# Altium PCB PCB1.PcbDoc (part 3 of 4)
Units mm, origin at the board's own origin, x right, y up, seen from the top; angles counter-clockwise.
Board outline 99.06 x 89.76 mm, 2 copper layers (Top Layer, Bottom Layer); 159 components, 99 nets, 478 pads, 226 vias.
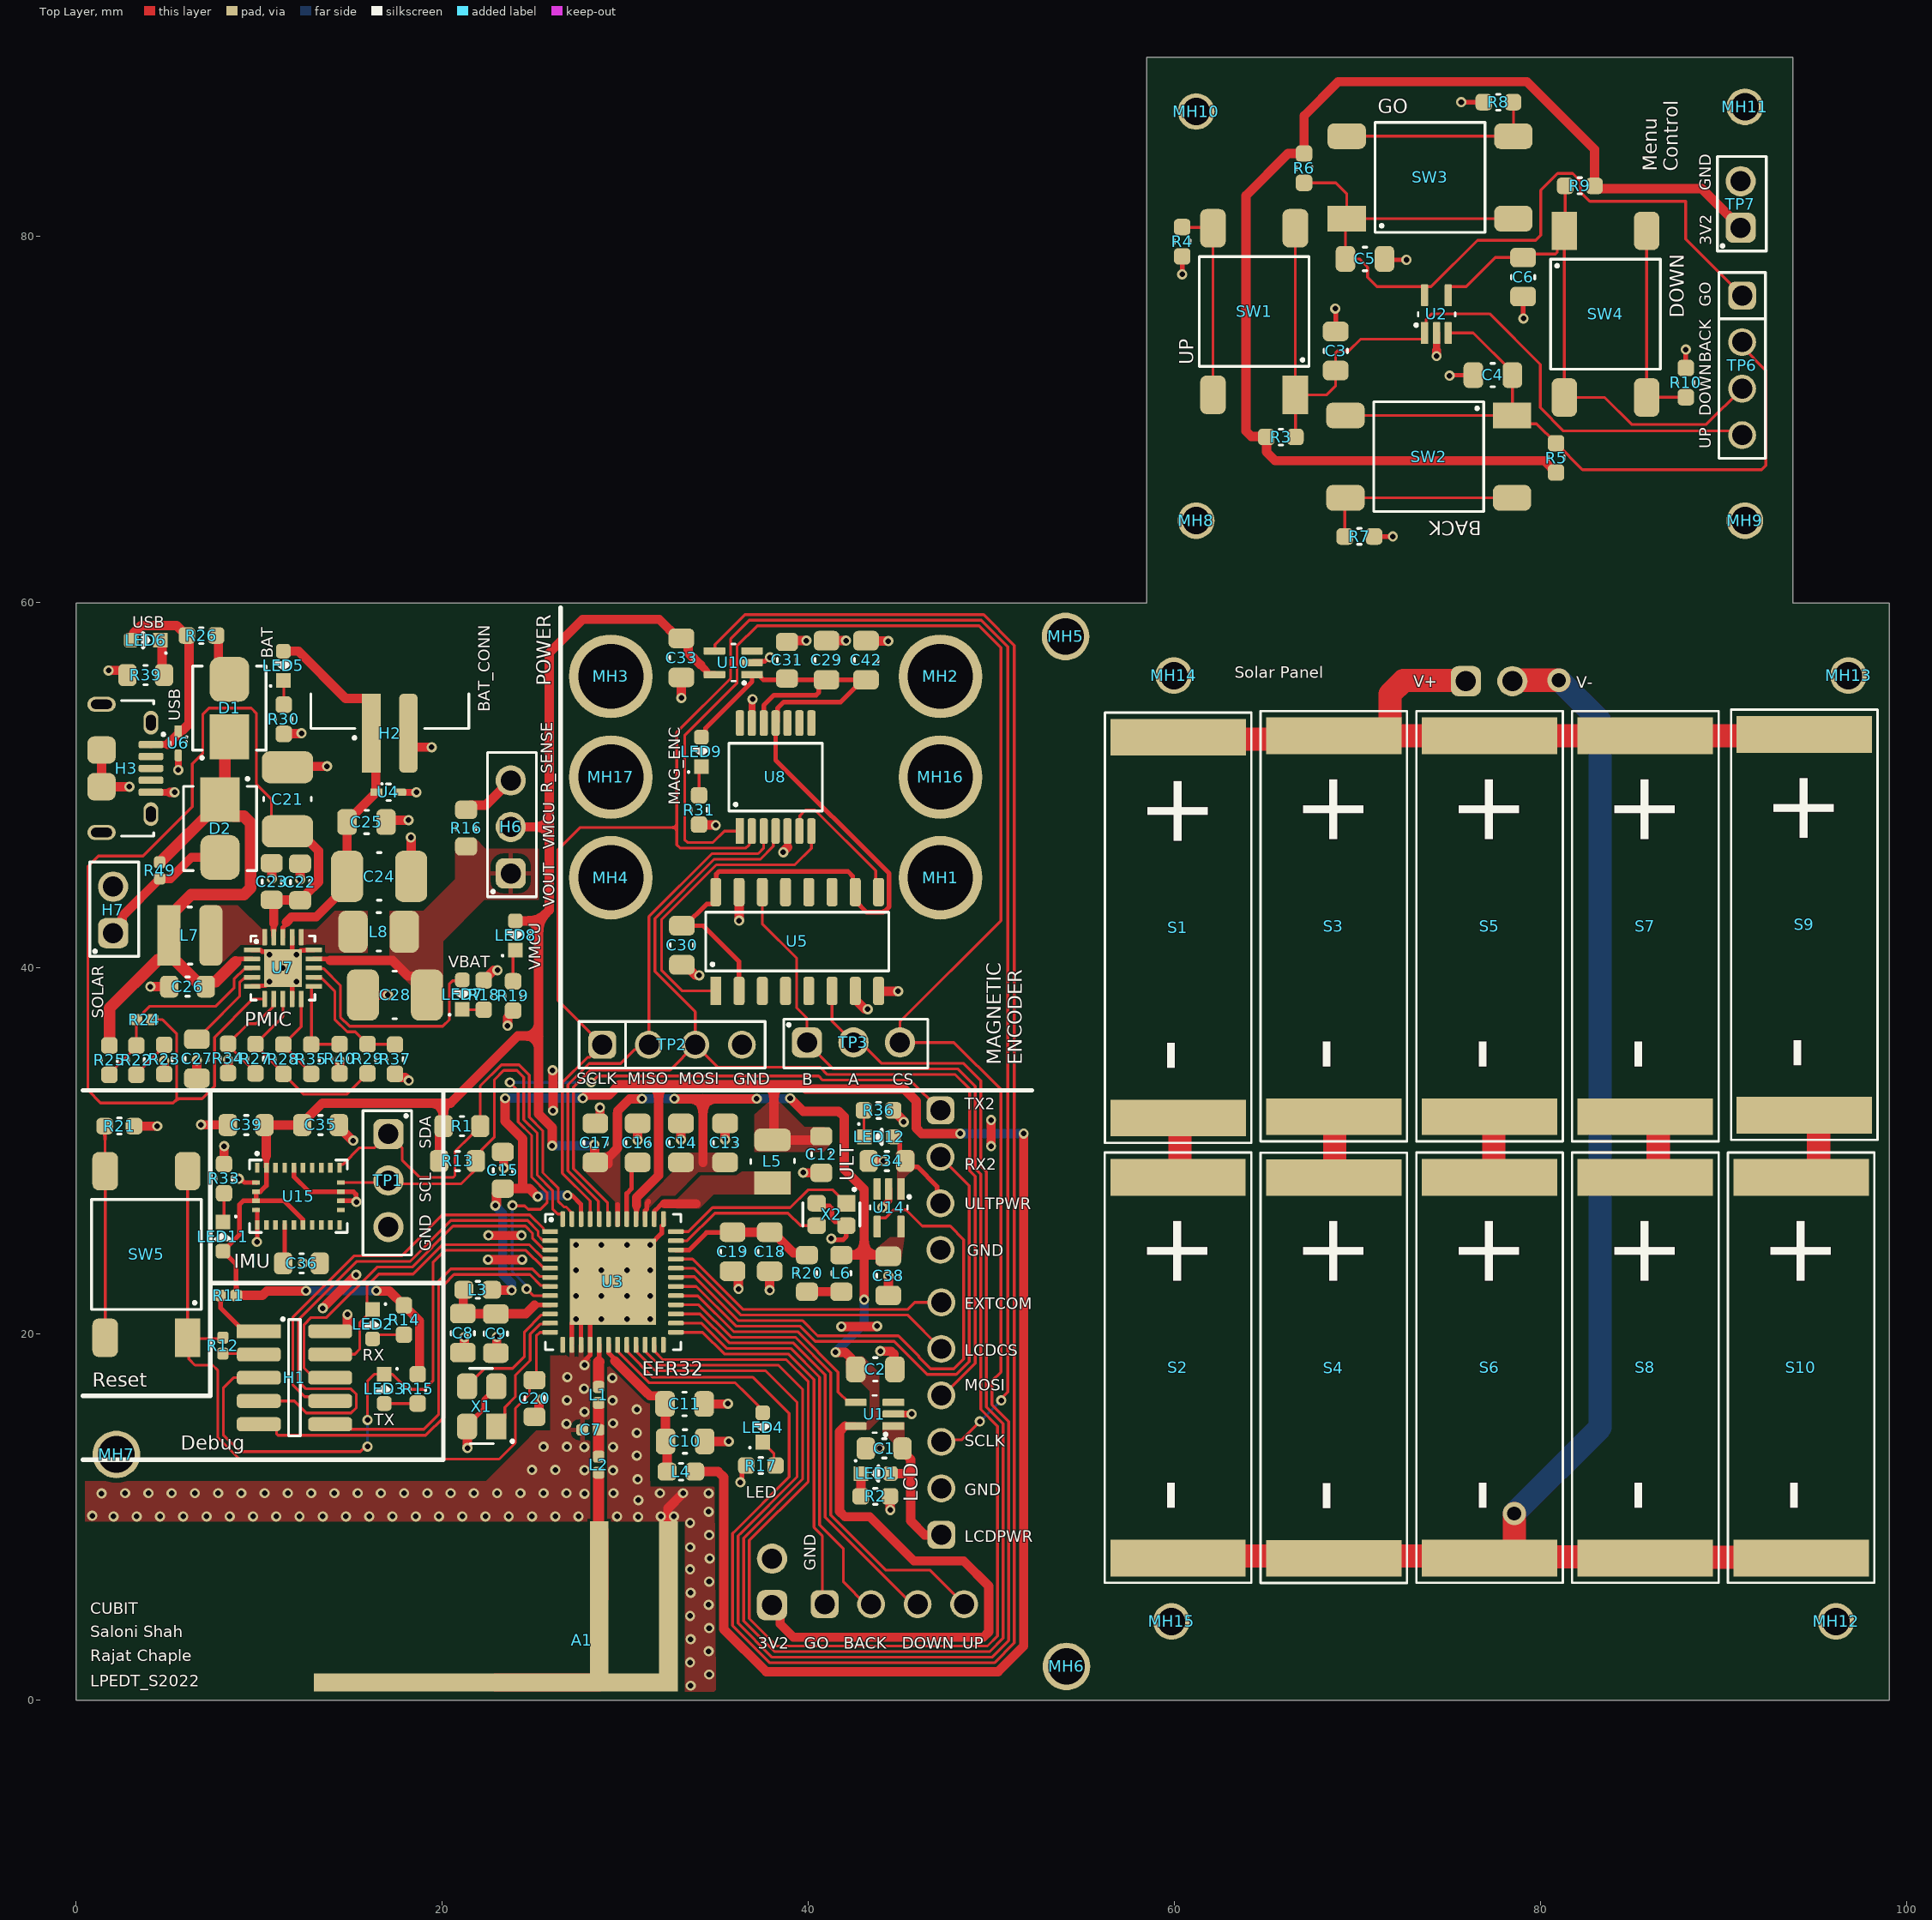
[diagram p0: Top Layer view]

## Via types
v1: diameter 0.559, hole 0.305, Top Layer to Bottom Layer, tented both sides, 222 vias
v2: diameter 0.61, hole 0.305, Top Layer to Bottom Layer, tented both sides, 2 vias
v3: diameter 1.27, hole 0.762, Top Layer to Bottom Layer, tented both sides, 2 vias

## Nets (pads, with @x,y where several pads share a name; then routed paths per layer and width w, separated by ;. In a path a pad name is that pad's centre, name@x,y a point inside that pad or via, vN(x,y) a via of type N, cw(c..) or ccw(c..) an arc to the next point about the centre after c; other vN are vias at no path point) (continued)
+1V8_DCDC: (continued)
  Top Layer w0.254: v1@26.858,27.575 27.112,27.575 27.584,27.102 27.584,26.298 U3.46@27.587,26.295 ; U3.40@30.587,26.295 30.59,26.298 30.59,26.64 30.617,26.668 30.617,27.061
  Top Layer w0.508: L3.1@22.706,22.428 22.721,22.413 23.79,22.413 v1(23.8,22.403) ; v1(22.902,27.026) 22.902,27.039 22.971,27.109 22.971,27.71 23.217,27.956 C15.1@23.317,27.956 24.409,27.956 ; v1(23.444,32.893) 23.444,31.631 24.4,30.676 24.4,27.966 24.409,27.956 ; v1(25.222,27.523) 25.208,27.523 24.775,27.956 24.409,27.956 ; v1(26.848,27.584) v1@26.858,27.575 ; v1(27.686,32.893) 27.7,32.893 27.88,33.073 29.115,33.073 29.672,33.63 31.825,33.63 ; 30.617,27.061 30.617,27.468 31.825,28.675 31.825,33.63 ; L4.1@33.805,12.497 35.085,12.497 35.382,12.199 35.382,3.892 37.699,1.575 50.367,1.575 51.765,2.973 v1(51.765,30.963) ; C12.1@40.716,30.82 40.51,30.614 38.125,30.614 38.125,33.63 ; v1(48.311,30.963) 46.195,30.963 45.898,31.26 45.898,32.741 45.237,33.401 39.853,33.401 39.624,33.63 38.125,33.63 ; 31.825,33.63 38.125,33.63
  Bottom Layer w0.508: v1(22.902,27.026) 22.902,27.018 23.311,26.609 23.311,23.273 23.79,22.794 23.79,22.413 v1(23.8,22.403) ; v1(23.444,32.893) 23.449,32.898 27.681,32.898 v1(27.686,32.893) ; v1(25.222,27.523) 25.236,27.523 25.298,27.584 v1@26.834,27.584 ; v1(48.311,30.963) v1(51.765,30.963)
+3V2_VMCU: C2.1 C13.1 C14.1 C17.1 C33.1 C35.1 C38.1 C39.1 H6.2 L6.1 LED8.A LED11.A R1.1 R11.1 R13.1 R14.1 R15.1 TP5.1 U1.5 U3.39 U3.42 U10.5 U14.5 U15.3 U15.4 U15.11 U15.28 | length 164.1
  Top Layer w0.254: R11.1@8.754,22.123 8.754,23.807 LED11.A@8.028,24.533 8.941,25.446 8.941,27.085 9.142,27.286 9.839,27.286 U15.4@9.841,27.288 ; 10.403,29.741 U15.28@10.403,29.1 10.403,28.117 10.075,27.79 9.843,27.79 U15.3@9.841,27.788 U15.4@9.841,27.288 ; U15.11@12.403,25.975 12.401,25.977 12.401,26.26 11.373,27.288 U15.4@9.841,27.288 ; U3.42@29.587,26.295 29.587,27.078 ; U3.39@31.087,26.295 31.09,26.298 31.09,26.746 31.184,26.84 31.184,27.149 31.267,27.233 31.267,27.28
  Top Layer w0.381: 34.112,56.566 34.47,56.208 34.47,56.042 34.479,56.032 U10.5@34.874,56.032 ; U1.5@42.004,14.986 U1.5@42.596,14.986
  Top Layer w0.508: R11.1@8.754,22.123 10.185,22.123 10.43,22.368 12.556,22.368 v1(12.566,22.377) ; 10.403,29.741 10.403,31.391 10.364,31.429 C35.1@12.295,31.429 ; C35.1@12.362,31.429 12.362,31.529 13.462,32.63 20.066,32.63 ; v1(16.408,22.377) 16.418,22.368 17.123,22.368 R14.1@17.913,21.577 18.77,20.721 18.77,17.919 R15.1@18.669,17.818 ; R13.1@19.844,29.464 19.844,31.131 R1.1@20.082,31.369 ; R1.1@20.066,31.369 20.066,32.63 ; H6.2@23.749,47.714 25.845,47.714 ; LED8.A@24.003,42.583 25.273,42.583 ; v1(26.01,30.302) 26.01,31.293 25.273,32.029 25.273,36.297 ; v1(28.321,30.353) 28.331,30.343 C17.1@28.331,29.429 ; 29.072,29.305 29.072,29.654 29.577,30.159 29.577,32.067 29.591,32.081 29.591,32.207 30.242,32.858 30.902,32.858 v1(30.912,32.868) ; v1@32.694,32.863 34.252,32.863 ; 34.112,56.566 33.437,57.241 33.437,57.735 33.159,58.014 C33.1@33.071,58.014 32.897,58.014 31.859,59.052 27.683,59.052 25.845,57.213 25.845,47.714 ; 34.252,29.388 34.252,32.863 ; v1@37.181,32.863 34.252,32.863 ; TP5.1@38.024,5.207 38.467,4.764 38.467,4.18 39.192,3.454 49.563,3.454 49.86,3.752 49.86,6.248 48.489,7.62 45.771,7.62 43.358,10.033 42.004,10.033 41.707,10.331 41.707,14.688 U1.5@42.004,14.986 ; v1(39.014,32.893) 39.726,32.182 41.663,32.182 41.961,31.884 41.961,29.007 43.056,27.911 43.056,24.327 ; v1(41.492,19.025) 41.502,19.015 42.019,19.015 42.324,18.709 C2.1@42.324,18.356 ; L6.1@41.808,24.327 43.056,24.327 ; v1(43.053,21.895) 43.053,24.323 43.056,24.327 ; C38.1@44.483,24.366 C38.1@44.374,24.257 44.304,24.327 43.056,24.327 ; 20.066,32.63 20.467,32.63 24.134,36.297 25.273,36.297 ; 25.273,36.297 25.273,42.583 ; 25.273,42.583 25.845,43.154 25.845,47.714
  Bottom Layer w0.508: v1(12.566,22.377) v1(16.408,22.377) ; v1(26.01,30.302) 28.256,30.302 28.307,30.353 v1(28.321,30.353) ; v1(30.912,32.868) v1(32.69,32.868) ; v1(37.186,32.868) 38.975,32.868 39.001,32.893 v1(39.014,32.893) ; v1(41.492,19.025) 43.053,20.586 v1(43.053,21.895)
+3V2_VMCU_S: R3.1 R5.1 R6.1 R9.1 TP7.1 | length 66.5
  Top Layer w0.508: R3.1@64.989,69.034 64.204,69.034 63.906,69.332 63.906,82.194 66.205,84.493 R6.1@67.081,84.493 67.081,86.55 68.949,88.417 79.248,88.417 82.944,84.722 R9.1@82.944,82.728 83.096,82.575 88.798,82.575 TP7.1@90.932,80.442 ; R3.1@65.011,69.012 65.026,68.997 65.026,68.197 65.507,67.716 80.201,67.716 R5.1@80.848,67.069